# Altium PCB sigsub.PcbDoc
Units mm, origin at the board's own origin, x right, y up, seen from the top; angles counter-clockwise.
Board outline 360 x 75 mm, 2 copper layers (Top Layer, Bottom Layer); 31 components, 80 nets, 211 pads, 39 vias.
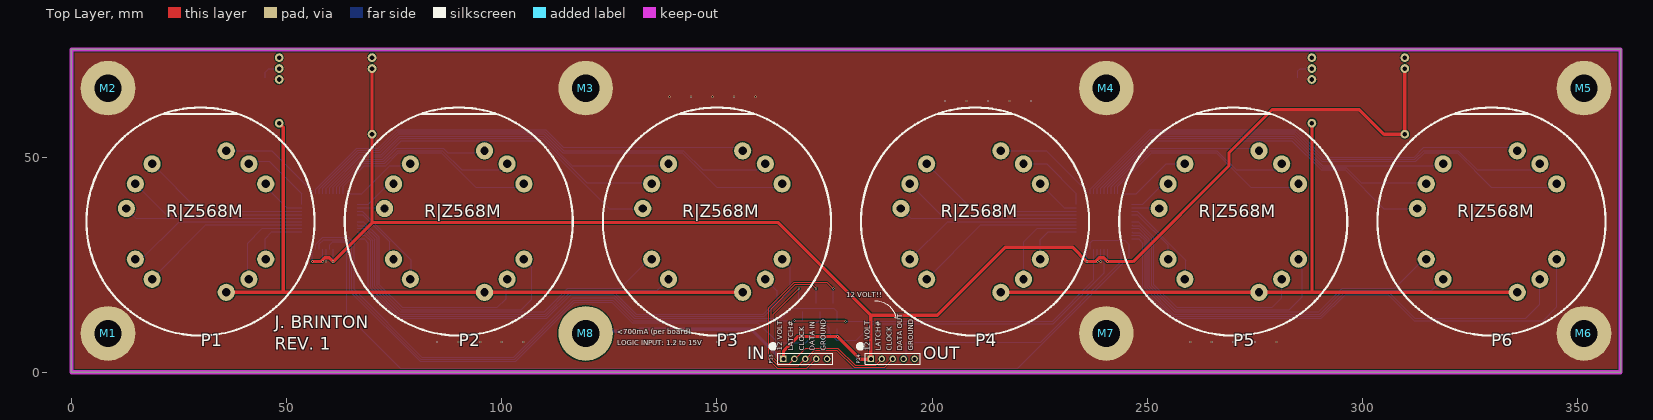
[diagram p0: Top Layer view]
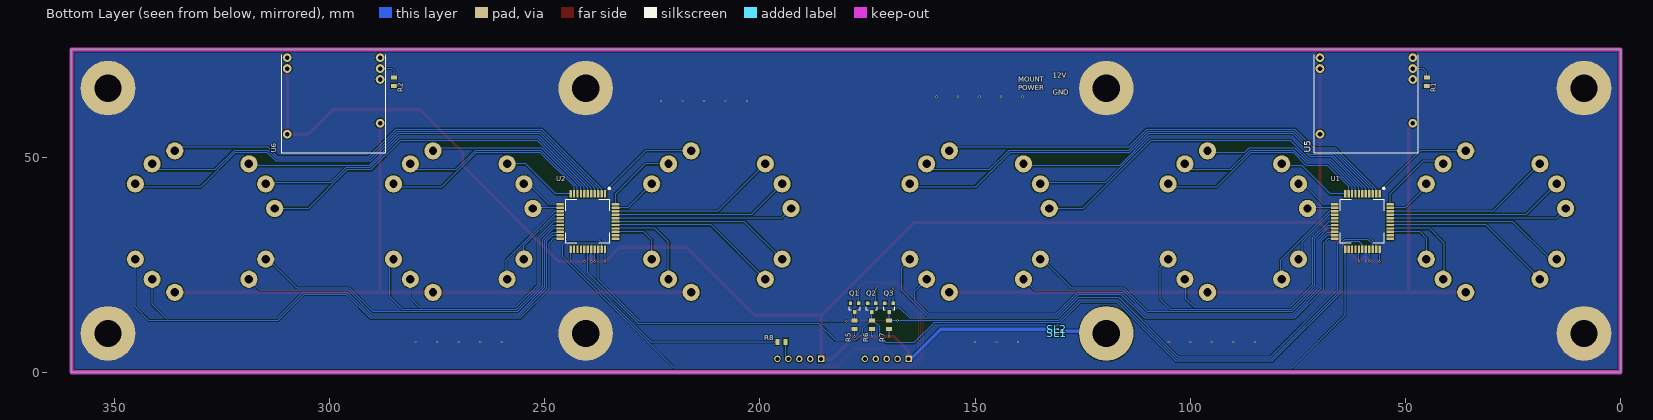
[diagram p1: Bottom Layer view, seen from below]
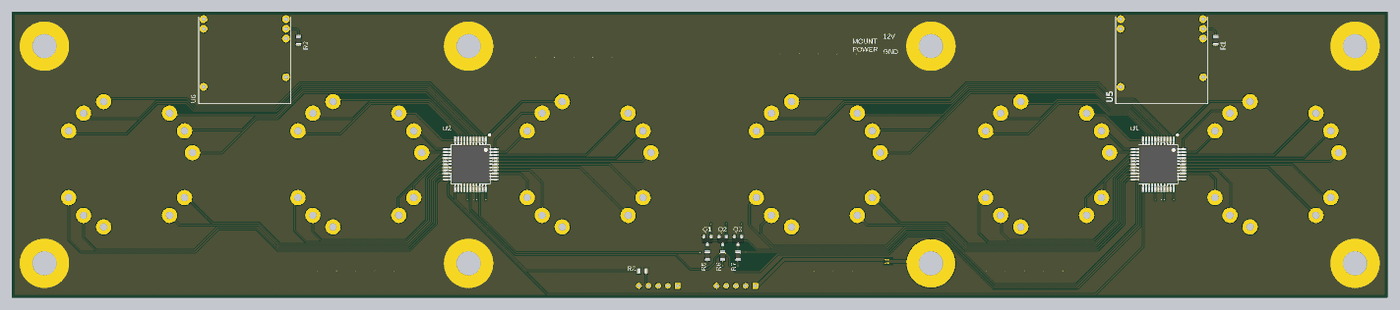
[diagram p2: 3D render of the assembled board from below, using the file's embedded part models]

## Layer stack, top to bottom
Top Solder: solder mask 0.0102, Solder Resist, Dk 3.5
Top Layer: signal copper 0.0356
Dielectric 1: dielectric 0.32, FR-4, Dk 4.8
Bottom Layer: signal copper 0.0356
Bottom Solder: solder mask 0.0102, Solder Resist, Dk 3.5

## Board outline
0,0 360,0 360,75 0,75

## Design rules (kind name [scope] priority, off if disabled: settings)
Clearance Clearance_solder_link [InComponent('SL*')] p1: gap=0.1
Clearance Clearance_hv [All] p2 off: gap=0.762
Clearance [All] p3: gap=0.254
HoleSize [All] p1: absolutevalues=TRUE maxlimit=6.35 minlimit=0.025 maxpercent=80.000 minpercent=20.000
MinimumSolderMaskSliver [All] p1 off: minsoldermaskwidth=0.254
PolygonConnect PolygonConnect_Vias [IsVia or InComponent('M*')] p1: connectstyle=Direct reliefconductorwidth=0.254 reliefentries=4 polygonreliefangle="90 Angle" airgapwidth=0.254
PolygonConnect [All] p2: connectstyle=Relief reliefconductorwidth=0.254 reliefentries=4 polygonreliefangle="90 Angle" airgapwidth=0.254
RoutingVias [All] p1: holewidth=0.711 width=1.27 viastyle="Through Hole" minholewidth=0.711 minwidth=1.27 maxholewidth=0.711 maxwidth=1.27
SilkToSilkClearance [All] p1 off: silktosilkclearance=0.254
SilkToSolderMaskClearance [IsPad] p1 off: minsilkscreentomaskgap=0.254 clearancetoexposedcopper=TRUE
SolderMaskExpansion [All] p1: expansion=0.102
Width [All] p1: maxlimit=2.54 minlimit=0.254 preferedwidth=0.254
26 further rules are at their usual default settings.

## Classes and differential pairs
net class HV: N1_0 N1_1 N1_2 N1_3 N1_4 N1_5 N1_6 N1_7 N1_8 N1_9 N2_0 N2_1 N2_2 N2_3 N2_4 N2_5 N2_6 N2_7 N2_8 N2_9 N3_0 N3_1 N3_2 N3_3 N3_4 N3_5 N3_6 N3_7 N3_8 N3_9 N4_0 N4_1 N4_2 N4_3 N4_4 N4_5 N4_6 N4_7 N4_8 N4_9 N5_0 N5_1 N5_2 N5_3 N5_4 N5_5 N5_6 N5_7 N5_8 N5_9 N6_0 N6_1 N6_2 N6_3 N6_4 N6_5 N6_6 N6_7 N6_8 N6_9 NA_S1 NA_S2 NB_S1 NB_S2

## Components (designator, comment, footprint, x,y, rotation, side; value= is the part's Value field where it differs from the comment)
M1 "MOUNT" MOUNT1-4_20 8.5,9 r180 top
M2 "MOUNT" MOUNT1-4_20 8.5,66 r180 top
M3 "MOUNT" MOUNT1-4_20 119.5,66 r180 top
M4 "MOUNT" MOUNT1-4_20 240.5,66 r180 top
M5 "MOUNT" MOUNT1-4_20 351.5,66 r180 top
M6 "MOUNT" MOUNT1-4_20 351.5,9 r180 top
M7 "MOUNT" MOUNT1-4_20 240.5,9 r180 top
M8 "MOUNT" MOUNT1-4_20 119.5,9 r180 top
P1 "RZ568M" RZ568M 30,35 r180 top locked
P2 "RZ568M" RZ568M 90,35 r180 top locked
P3 "RZ568M" RZ568M 150,35 r180 top locked
P4 "RZ568M" RZ568M 210,35 r180 top locked
P5 "RZ568M" RZ568M 270,35 r180 top locked
P6 "RZ568M" RZ568M 330,35 r180 top locked
P13 "PEC06SBAN" HDR1X5 165.46,3.1 r0 top
P14 "PEC06SBAN" HDR1X5 185.78,3.1 r0 top
Q1 "ZXM61N03F" SOT23 178,15 r0 bottom
Q2 "ZXM61N03F" SOT23 174,15 r0 bottom
Q3 "ZXM61N03F" SOT23 170,15 r0 bottom
R1 "ERJ-6ENF4702V" 0805 45,67.5 r270 bottom
R2 "ERJ-6ENF4702V" 0805 285,67.5 r270 bottom
R5 "ERJ-6ENF4702V" 0805 178,11 r270 bottom
R6 "ERJ-6ENF4702V" 0805 174,11 r270 bottom
R7 "ERJ-6ENF4702V" 0805 170,11 r270 bottom
R8 "ERJ-6ENF4702V" 0805 195,7 r180 bottom
SL1 "SOLDER_LINK" SOLDERLINK0603X26N 131,9 r0 bottom
SL2 "SOLDER_LINK" SOLDERLINK0603X26N 131,10 r0 bottom
U1 "HV5622PG" QFP44P80_1390X1390X235L88X37N 60,35 r0 bottom
U2 "HV5622PG" QFP44P80_1390X1390X235L88X37N 240,35 r0 bottom
U5 "1364HVPS-H" 1364HVPS-H 59.065,62.935 r270 bottom
U6 "1364HVPS-H" 1364HVPS-H 299.065,62.935 r270 bottom

## Footprints (in the part's own frame and the unit in brackets; to place one, negate y for a bottom-side part, rotate by r counter-clockwise, add the part's x,y. Pads: shape width x height; smd on the part's side, far side on the other; paste and mask are expansions set on the pad)
0805 [mm] "SMD; Body 2 x 1.2 mm (LxW typ)"
  rect 0.92x1.38 smd: 1(-0.955,0) 2(0.955,0)
  body extent -1,-0.63 1,0.63, height 1.2
1364HVPS-H [mil] "High Voltage Power Supply"
  round 80 hole 42: E1(200,425) E2(-300,425) E3(-200,425) E4(-300,-425) E5(-400,-425) E6(-400,425) E7(300,-425)
  silkscreen extent -425,-475 475,475
HDR1X5 [mm] "Connector; Header; 5 Position"
  rect 1.5x1.5 hole 0.9: 1(0,0)
  round 1.5 hole 0.9: 2(2.54,0) 3(5.08,0) 4(7.62,0) 5(10.16,0)
  silkscreen extent -1.27,-1.27 11.43,1.27
MOUNT1-4_20 [mm] "1/4-20 mount"
  round 12.7 hole 6.35: 1(0,0)
QFP44P80_1390X1390X235L88X37N [mm] "Quad Flat Pack (QFP), 0.80 mm pitch; square, 11 pin X 11 pin, 10.00 mm L X 10.00 mm W X 2.35 mm H body"
  rrect49% 0.545x1.78 smd mask+0.05: 1(-4,-6.44) 2(-3.2,-6.44) 3(-2.4,-6.44) 4(-1.6,-6.44) 5(-0.8,-6.44) 6(0,-6.44) 7(0.8,-6.44) 8(1.6,-6.44) 9(2.4,-6.44) 10(3.2,-6.44) 11(4,-6.44) 23(4,6.44) 24(3.2,6.44) 25(2.4,6.44) 26(1.6,6.44) 27(0.8,6.44) 28(0,6.44) 29(-0.8,6.44) 30(-1.6,6.44) 31(-2.4,6.44) 32(-3.2,6.44) 33(-4,6.44)
  rrect49% 1.78x0.545 smd mask+0.05: 12(6.44,-4) 13(6.44,-3.2) 14(6.44,-2.4) 15(6.44,-1.6) 16(6.44,-0.8) 17(6.44,0) 18(6.44,0.8) 19(6.44,1.6) 20(6.44,2.4) 21(6.44,3.2) 22(6.44,4) 34(-6.44,4) 35(-6.44,3.2) 36(-6.44,2.4) 37(-6.44,1.6) 38(-6.44,0.8) 39(-6.44,0) 40(-6.44,-0.8) 41(-6.44,-1.6) 42(-6.44,-2.4) 43(-6.44,-3.2) 44(-6.44,-4)
  silkscreen extent -5.2,-7.9 5.1,5.1, body extent -6.95,-6.95 6.95,6.95, height 2.35
RZ568M [mm] "Nixie Tube Socket"
  round 4 hole 1.95: 0(-15.155,8.75) 1(-5.985,-16.445) 2(-15.155,-8.75) 3(11.249,13.406) 4(-11.249,-13.406) 5(17.234,-3.039) 6(-11.249,13.406) 7(15.155,8.75) 8(11.249,-13.406) 9(15.155,-8.75) A(-5.985,16.445)
  silkscreen extent -26.5,-26.5 26.5,26.5
SOLDERLINK0603X26N [mm] "Resistor, Chip; 0.60 mm L X 0.30 mm W X 0.26 mm H body"
  rrect50% 0.27x0.4 smd paste-0.4 mask+0.05: 1(-0.335,0)
  rrect50% 0.37x0.4 smd paste-0.4 mask+0.05: 2(0.285,0)
  Top Layer region: 0.138,0.2 0.012,0 0.138,-0.2 0.298,-0.2 0.298,0.2
  Top Layer region: 0.013,-0.2 -0.112,0 0.013,0.2 -0.298,0.2 -0.298,-0.2
SOT23 [mm] "SOT-23; 3 Leads; Body 3.0 x 2.5 mm, inc. leads (LxW max)"
  rect 0.8x0.9 smd: 1(-0.95,-1) 2(0.95,-1) 3(0,1)
  silkscreen extent -1.27,-0.2 1.28,0.6, body extent -1.46,-1.14 1.46,1.2, height 1

## Part data
P1 P2 P3 P4 P5 P6: "Nixie Tube Socket"
P13 P14: "Header, 5-Pin, Right Angle, 0.1\" pitch"
Q1 Q2 Q3: library part BSH103, "N-Channel Enhancement Mode MOSFET transistor"
R1 R2 R5 R6 R7 R8: library part RES, "Thick Film Resistor 47k +/-1% 0805"
SL1 SL2: library part RES, "Solder Link"
U1 U2: "32-Channel Serial to Parallel Converter"
U5 U6: "High Voltage Power Supply"

## Via types
v1: diameter 0.483, hole 0.254, Top Layer to Bottom Layer, tented both sides, 39 vias

## Nets (pads, with @x,y where several pads share a name; then routed paths per layer and width w, separated by ;. In a path a pad name is that pad's centre, name@x,y a point inside that pad or via, vN(x,y) a via of type N, cw(c..) or ccw(c..) an arc to the next point about the centre after c; other vN are vias at no path point)
CLK: Q2.3 R6.1 U1.28 U2.28 | length 228.6
  Bottom Layer w0.254: U1.28 60,29.6 60.7,30.3 63.883,30.3 64.654,29.53 64.654,18.847 81.016,2.484 103.202,2.484 116.941,16.223 125.622,16.223 130.369,11.476 159.524,11.476 164.2,6.8 170.6,6.8 172.2,8.4 172.2,10.5 173.655,11.955 R6.1 ; Q2.3 R6.1 ; U2.28 240,23.1 228.2,11.3 186.3,11.3 182.4,7.4 177.8,7.4 176.1,9.1 176.1,10.2 174.345,11.955 R6.1
CLK_LV: P13.3 P14.3 Q2.1 | length 61.2
  Top Layer w0.254: P13.3 168.901,1.461 164.242,1.461 163.453,2.25 163.45,2.25 162.592,3.108 162.592,14.792 168.2,20.4 172.05,20.4 v1(173.05,19.4) ; P13.3@170.59,3.05 172.632,5.092 177.89,5.092 181.89,1.092 188.952,1.092 P14.3@190.86,3
  Bottom Layer w0.254: Q2.1 v1(173.05,19.4)
D2X: R8.1 U2.23 | length 58.6
  Bottom Layer w0.254: R8.1 225.282,7 244,25.718 U2.23
D12: U1.23 U2.32 | length 226.9
  Bottom Layer w0.254: U1.23 64,13.3 76.419,0.881 219.881,0.881 245.8,26.8 245.8,29.6 244.8,30.6 237.3,30.6 236.8,30.1 U2.32
DIN: Q1.3 R5.1 U1.32 | length 151.9
  Bottom Layer w0.254: U1.32 56.8,29.718 58.398,31.316 64.304,31.316 65.67,29.95 65.67,19.267 81.437,3.5 102.782,3.5 116.521,17.239 126.043,17.239 130.79,12.492 165.092,12.492 167.5,14.9 177.1,14.9 Q1.3 R5.1
DIN_LV: P13.4 Q1.1 | length 46.2
  Top Layer w0.254: P13.4 170.933,0.953 164.031,0.953 163.244,1.741 163.241,1.741 162.084,2.898 162.084,15.002 167.99,20.908 175.542,20.908 v1(177.05,19.4)
  Bottom Layer w0.254: Q1.1 v1(177.05,19.4)
GND: M1.1 M2.1 M3.1 M4.1 M5.1 M6.1 M7.1 P13.5 P14.5 Q1.2 Q2.2 Q3.2 R1.2 R2.2 SL1.2 U1.29 U2.29 U5.E3 U5.E5 U6.E3 U6.E5 | length 6.8
  Bottom Layer w0.254: v1(59.2,25.7) U1.29 ; SL1.2 132.4,9 ; v1(239.2,25.7) U2.29
  other v1: 85,7 90,7 95,7 100,7 105,7 140,7 145,7 150,7 260,7 265,7 270,7 275,7 280,7 203,63 208,63 213,63 218,63 223,63 139,64 144,64 149,64 154,64 159,64
HV1: P1.A P2.A P3.A U5.E1 | length 159.7
  Top Layer w0.762: P1.A P2.A P3.A ; U5.E1 49.205,56.92 49.205,18.555
HV2: P4.A P5.A P6.A U6.E1 | length 159
  Top Layer w0.762: P4.A P5.A 288.27,18.555 P6.A ; 288.27,18.825 U6.E1
LE#: Q3.3 R7.1 U1.31 U2.31 | length 222.3
  Top Layer w0.254: v1(168,11.984) 179.724,11.984 v1(179.9,11.808)
  Bottom Layer w0.254: U1.31 57.6,29.8 58.608,30.808 64.094,30.808 65.162,29.74 65.162,19.057 81.226,2.992 102.992,2.992 116.731,16.731 125.832,16.731 130.579,11.984 v1(168,11.984) 169.971,11.984 R7.1 Q3.3 ; v1(179.9,11.808) 227.99,11.808 237.6,21.418 U2.31
LE#_LV: P13.2 P14.2 Q3.1 | length 51.4
  Top Layer w0.254: P13.2 166.869,1.969 164.452,1.969 163.1,3.321 163.1,13.45 v1(169.05,19.4) ; P13.2@168.05,3.05 170.6,5.6 178.1,5.6 182.1,1.6 186.92,1.6 P14.2@188.32,3
  Bottom Layer w0.254: Q3.1 v1(169.05,19.4)
N1_0: P1.0 U1.36 | length 14
  Bottom Layer w0.254: P1.0 45,26.405 45,31 46.6,32.6 U1.36
N1_1: P1.1 U1.1 | length 24.5
  Bottom Layer w0.254: P1.1 46.555,51.445 56,42 U1.1
N1_2: P1.2 U1.43 | length 11.1
  Bottom Layer w0.254: P1.2 45.155,43.045 50,38.2 U1.43
N1_3: P1.3 U1.38 | length 40.1
  Bottom Layer w0.254: P1.3 18.751,21.751 31.2,34.2 U1.38
N1_4: P1.4 U1.44 | length 17.3
  Bottom Layer w0.254: P1.4@41.843,49 46,49 53.56,41.44 U1.44
N1_5: P1.5 U1.40 | length 41.7
  Bottom Layer w0.254: P1.5 15.005,35.8 U1.40
N1_6: P1.6 U1.37 | length 22.5
  Bottom Layer w0.254: P1.6 41,21.843 41,30 44.4,33.4 U1.37
N1_7: P1.7 U1.39 | length 42.3
  Bottom Layer w0.254: P1.7 16.25,26.25 25,35 U1.39
N1_8: P1.8 U1.42 | length 39.4
  Bottom Layer w0.254: P1.8 29.757,37.4 U1.42
N1_9: P1.9 U1.41 | length 41.7
  Bottom Layer w0.254: P1.9 21.995,36.6 U1.41
N2_0: P2.0 U1.18 | length 66.2
  Bottom Layer w0.254: U1.18 66.586,34.054 68.102,34.054 71.032,31.123 71.032,20.123 76.631,14.524 104.524,14.524 107,17 107,24.405 P2.0
N2_1: P2.1 U1.8 | length 39.1
  Bottom Layer w0.254: U1.8 61.6,43.037 67.579,49.016 72.579,49.016 75.579,52.016 86.421,52.016 87.437,51 P2.1@95,51
N2_2: P2.2 U1.10 | length 50.6
  Bottom Layer w0.254: U1.10 63.2,43.2 68,48 73,48 76,51 86,51 94,43 104.405,43 P2.2
N2_3: P2.3 U1.14 | length 21.8
  Bottom Layer w0.254: U1.14 67.629,37.4 79,26.029 79,21.843 P2.3
N2_4: P2.4 U1.9 | length 46.5
  Bottom Layer w0.254: U1.9 62.4,43.118 67.79,48.508 72.79,48.508 75.79,51.508 86.21,51.508 90.718,47 99.843,47 P2.4
N2_5: P2.5 U1.13 | length 6.4
  Bottom Layer w0.254: U1.13 72.605,38.2 P2.5
N2_6: P2.6 U1.17 | length 54.8
  Bottom Layer w0.254: U1.17 67.874,35 71.54,31.334 71.54,20.334 76.842,15.032 99,15.032 101,17.032 101,21.345 P2.6
N2_7: P2.7 U1.15 | length 14.6
  Bottom Layer w0.254: U1.15 67.711,36.6 74,30.311 74,27.095 P2.7
N2_8: P2.8 U1.11 | length 17.6
  Bottom Layer w0.254: U1.11 67.44,41.44 74,48 78.345,48 P2.8
N2_9: P2.9 U1.12 | length 10.4
  Bottom Layer w0.254: U1.12 69,39 73.75,43.75 P2.9
N3_0: P3.0 U1.22 | length 129.4
  Bottom Layer w0.254: U1.22 68,31 69,30 69,19.282 75.79,12.492 110.492,12.492 116,18 126,18 131,13 161,13 167,19 167,24.405 P3.0
N3_1: P3.1 U1.2 | length 108.1
  Bottom Layer w0.254: U1.2 56.8,42.547 66.317,52.064 71.317,52.064 75.619,56.366 110.226,56.366 114.35,52.242 155.188,52.242 P3.1
N3_2: P3.2 U1.4 | length 118.7
  Bottom Layer w0.254: U1.4 58.4,42.711 66.737,51.048 71.737,51.048 76.039,55.35 109.805,55.35 114.155,51 142,51 150,43 164.405,43 P3.2
N3_3: P3.3 U1.20 | length 90
  Bottom Layer w0.254: U1.20 66.586,32.454 68.265,32.454 70.016,30.702 70.016,19.702 76.21,13.508 110.071,13.508 115.579,19.016 136.173,19.016 P3.3
N3_4: P3.4 U1.3 | length 114.6
  Bottom Layer w0.254: U1.3 57.6,42.629 66.527,51.556 71.527,51.556 75.829,55.858 110.016,55.858 114.366,51.508 142.21,51.508 146.718,47 159.843,47 P3.4
N3_5: P3.5 U1.7 | length 84.6
  Bottom Layer w0.254: U1.7 60.8,42.955 67.369,49.524 72.369,49.524 76.671,53.826 109.174,53.826 125,38 132.727,38 P3.5
N3_6: P3.6 U1.21 | length 123.6
  Bottom Layer w0.254: U1.21 68.2,31.8 69.508,30.492 69.508,19.492 76,13 110.282,13 115.79,18.508 126.21,18.508 131.21,13.508 160.79,13.508 164,16.718 164,19 163.843,19 P3.6
N3_7: P3.7 U1.19 | length 87.9
  Bottom Layer w0.254: U1.19 68.037,33.4 70.524,30.913 70.524,19.913 76.421,14.016 109.861,14.016 115.369,19.524 127.524,19.524 134.25,26.25 P3.7
N3_8: P3.8 U1.5 | length 88.9
  Bottom Layer w0.254: U1.5 59.2,42.792 66.948,50.54 71.948,50.54 76.25,54.842 109.595,54.842 116.437,48 138.345,48 P3.8
N3_9: P3.9 U1.6 | length 85.4
  Bottom Layer w0.254: U1.6 60,42.874 67.158,50.032 72.158,50.032 76.46,54.334 109.384,54.334 119.718,44 134.595,44 P3.9
N4_0: P4.0 U2.36 | length 13.7
  Bottom Layer w0.254: P4.0 225.155,30.755 227,32.6 U2.36
N4_1: P4.1 U2.1 | length 24.5
  Bottom Layer w0.254: P4.1 226.555,51.445 236,42 U2.1
N4_2: P4.2 U2.43 | length 10.7
  Bottom Layer w0.254: P4.2 230.705,38.2 U2.43
N4_3: P4.3 U2.38 | length 40
  Bottom Layer w0.254: P4.3 211.357,34.2 U2.38
N4_4: P4.4 U2.44 | length 17.6
  Bottom Layer w0.254: P4.4 226.594,48.406 233.56,41.44 U2.44
N4_5: P4.5 U2.40 | length 41.7
  Bottom Layer w0.254: P4.5 195.005,35.8 U2.40
N4_6: P4.6 U2.37 | length 22.3
  Bottom Layer w0.254: P4.6 221.249,30.249 224.4,33.4 U2.37
N4_7: P4.7 U2.39 | length 42.3
  Bottom Layer w0.254: P4.7 203.595,35 U2.39
N4_8: P4.8 U2.42 | length 39.4
  Bottom Layer w0.254: P4.8 209.757,37.4 U2.42
N4_9: P4.9 U2.41 | length 41.7
  Bottom Layer w0.254: P4.9 201.995,36.6 U2.41
N5_0: P5.0 U2.18 | length 64.5
  Bottom Layer w0.254: U2.18 246.586,34.054 248.102,34.054 251.032,31.123 251.032,20.123 256.631,14.524 283,14.524 286,17.524 286,25.405 P5.0
N5_1: P5.1 U2.8 | length 39.9
  Bottom Layer w0.254: U2.8 241.6,43.037 250.579,52.016 275.414,52.016 P5.1
N5_2: P5.2 U2.10 | length 50.6
  Bottom Layer w0.254: U2.10 243.2,43.2 251,51 266,51 274,43 284.405,43 P5.2
N5_3: P5.3 U2.14 | length 21.8
  Bottom Layer w0.254: U2.14 247.629,37.4 259,26.029 259,21.843 P5.3
N5_4: P5.4 U2.9 | length 46.5
  Bottom Layer w0.254: U2.9 242.4,43.118 250.79,51.508 266.21,51.508 270.718,47 279.843,47 P5.4
N5_5: P5.5 U2.13 | length 6.4
  Bottom Layer w0.254: U2.13 252.605,38.2 P5.5
N5_6: P5.6 U2.17 | length 54.8
  Bottom Layer w0.254: U2.17 247.874,35 251.54,31.334 251.54,20.334 256.842,15.032 279,15.032 281.249,17.281 P5.6
N5_7: P5.7 U2.15 | length 14.6
  Bottom Layer w0.254: U2.15 247.711,36.6 254.845,29.466 P5.7
N5_8: P5.8 U2.11 | length 17.6
  Bottom Layer w0.254: U2.11 247.44,41.44 254.406,48.406 P5.8
N5_9: P5.9 U2.12 | length 10.4
  Bottom Layer w0.254: U2.12 249,39 253.75,43.75 P5.9
N6_0: P6.0 U2.22 | length 129.8
  Bottom Layer w0.254: U2.22 248,31 249,30 249,19.282 255.79,12.492 290.492,12.492 296,18 306,18 312,12 342,12 345.155,15.155 P6.0
N6_1: P6.1 U2.2 | length 109.9
  Bottom Layer w0.254: U2.2 236.8,42.547 250.619,56.366 284.634,56.366 291,50 312,50 314.242,52.242 335.188,52.242 P6.1
N6_2: P6.2 U2.4 | length 120.4
  Bottom Layer w0.254: U2.4 238.4,42.711 251.039,55.35 284.213,55.35 290.579,48.984 312.421,48.984 314.437,51 322,51 330,43 344.405,43 P6.2
N6_3: P6.3 U2.20 | length 90
  Bottom Layer w0.254: U2.20 246.586,32.454 248.265,32.454 250.016,30.702 250.016,19.702 256.21,13.508 290.071,13.508 295.579,19.016 316.173,19.016 P6.3
N6_4: P6.4 U2.3 | length 116.2
  Bottom Layer w0.254: U2.3 237.6,42.629 250.829,55.858 284.424,55.858 290.79,49.492 312.21,49.492 314.226,51.508 322.21,51.508 326.718,47 339.843,47 P6.4
N6_5: P6.5 U2.7 | length 84.6
  Bottom Layer w0.254: U2.7 240.8,42.955 251.671,53.826 283.582,53.826 290.424,46.984 296.016,46.984 305,38 312.727,38 P6.5
N6_6: P6.6 U2.21 | length 121
  Bottom Layer w0.254: U2.21 248.2,31.8 249.508,30.492 249.508,19.492 256,13 290.282,13 295.79,18.508 306.21,18.508 312.21,12.508 338,12.508 341.249,15.757 P6.6
N6_7: P6.7 U2.19 | length 87.9
  Bottom Layer w0.254: U2.19 248.037,33.4 250.524,30.913 250.524,19.913 256.421,14.016 289.861,14.016 295.369,19.524 307.524,19.524 314.25,26.25 P6.7
N6_8: P6.8 U2.5 | length 88.3
  Bottom Layer w0.254: U2.5 239.2,42.792 251.25,54.842 284.003,54.842 290.845,48 P6.8@318.345,48
N6_9: P6.9 U2.6 | length 85.4
  Bottom Layer w0.254: U2.6 240,42.874 251.46,54.334 283.792,54.334 290.634,47.492 296.226,47.492 299.718,44 314.595,44 P6.9
NA_S1: U1.16
NA_S2: U1.35
NB_S1: U2.16
NB_S2: U2.35
NetM8_1: M8.1 SL1.1 SL2.1 | length 12.3
  Bottom Layer w0.254: SL1.1 130.165,9.5 SL2.1
  Bottom Layer w0.762: M8.1 120,9.5 130.165,9.5
NetP14_4: P14.4 R8.2 | length 4.3
  Bottom Layer w0.254: P14.4@193.4,3 194.045,3.645 R8.2
NetR1_1: R1.1 U5.E2 | length 4.9
  Bottom Layer w0.254: R1.1 45,69.7 45.855,70.555 U5.E2
NetR2_1: R2.1 U6.E2 | length 5
  Bottom Layer w0.254: R2.1 285,70 285.555,70.555 U6.E2
V12: P13.1 P14.1 R5.2 R6.2 R7.2 SL2.2 U1.27 U1.30 U1.33 U2.27 U2.30 U2.33 U5.E4 U5.E7 U6.E4 U6.E7 | length 440.7
  Top Layer w0.762: v1(56,25.7) 57.961,25.7 58.837,26.576 59.924,26.576 v1(60.8,25.7) 69.86,34.76 ; U5.E4 U5.E7 69.86,34.76 ; P13.1@165.46,3 165.46,4.86 168.9,8.3 v1(170,8.3) v1(174,8.3) v1(178,8.3) 183.3,3 185.78,3 185.78,13.22 ; U6.E4 U6.E7 305,55.315 299.315,61 279,61 269,51 269,48 246.7,25.7 v1(240.8,25.7) 239.924,26.576 238.837,26.576 237.961,25.7 v1(236,25.7) 232.7,29 217,29 201.22,13.22 185.78,13.22 ; 69.86,34.76 164.24,34.76 185.78,13.22
  Bottom Layer w0.254: v1(56,25.7) U1.33 ; v1(58.4,25.7) U1.30 ; v1(60.8,25.7) U1.27 ; SL2.2 132.1,10 ; v1(170,8.3) R7.2 ; v1(174,8.3) R6.2 ; v1(178,8.3) R5.2 ; v1(236,25.7) U2.33 ; v1(238.4,25.7) U2.30 ; v1(240.8,25.7) U2.27
  Bottom Layer w0.762: 132.1,10 158,10 P13.1@165,3
pads on no net: U1.24 U1.25 U1.26 U1.34 U2.24 U2.25 U2.26 U2.34 U5.E6 U6.E6

## Polygon pours and split planes (outlines as drawn)
GND on Bottom Layer "GND_B" (solid, remove dead copper, pour order 0): 0,0 360,0 360,75 1,75 0,75
GND on Top Layer "GND_T" (solid, remove dead copper, pour order 2): 0,0 360,0 360,75 1,75 0,75

## Keep-outs
Keep-Out Layer:
  the board outline again, w1

## Other copper
Bottom Layer:
  pour cut-out: 132.1,10.7 129.4,10.7 129.4,8.5 132.1,8.5

## Silkscreen, mask and mechanical layers (free items; w line width, h text height)
Top Overlay:
  circle w1: c183.32,6 r0.5
  circle w1: c163,6 r0.5
  lines w0.127: 186.738,16.514 cw(c186.738,11.278) 191.818,12.548 ; 191.31,12.802 191.818,12.548 ; 192.072,13.056 191.818,12.548
  text "R|Z568M" at 22,35 h5
  text "R|Z568M" at 82,35 h5
  text "R|Z568M" at 142,35 h5
  text "R|Z568M" at 202,35 h5
  text "R|Z568M" at 262,35 h5
  text "R|Z568M" at 322,35 h5
  text "12 VOLT!!" at 180,17 h2
  text "<700mA (per board)" at 126.81,8.31 h2
  text "LOGIC INPUT: 1.2 to 15V" at 126.81,5.77 h2
  text "12 VOLT" at 165.64,4.96 h2 r90
  text "LATCH#" at 168.18,4.96 h2 r90
  text "CLOCK" at 170.72,4.96 h2 r90
  text "DATA IN" at 173.26,4.96 h2 r90
  text "GROUND" at 175.8,4.96 h2 r90
  text "12 VOLT" at 185.96,4.96 h2 r90
  text "LATCH#" at 188.5,4.96 h2 r90
  text "CLOCK" at 191.04,4.96 h2 r90
  text "DATA OUT" at 193.58,4.96 h2 r90
  text "GROUND" at 196.12,4.96 h2 r90
  text "J. BRINTON / REV. 1" at 47.2,4.2 h5
  text "IN" at 157,2 h5
  text "OUT" at 198,2 h5
Bottom Overlay:
  text "12V" at 132,68 h2
  text "MOUNT / POWER" at 140,65 h2
  text "GND" at 132,64 h2
Mechanical 1:
  the board outline again, w1
  text "FRONT" at 169.3,65.3 h5
Mechanical 2:
  the board outline again, w1